# Altium PCB PCB_Sensors.PcbDoc
Units mm, origin at the board's own origin, x right, y up, seen from the top; angles counter-clockwise.
Board outline 180 x 30 mm, 2 copper layers (Top Layer, Bottom Layer); 14 components, 9 nets, 43 pads, 65 vias.
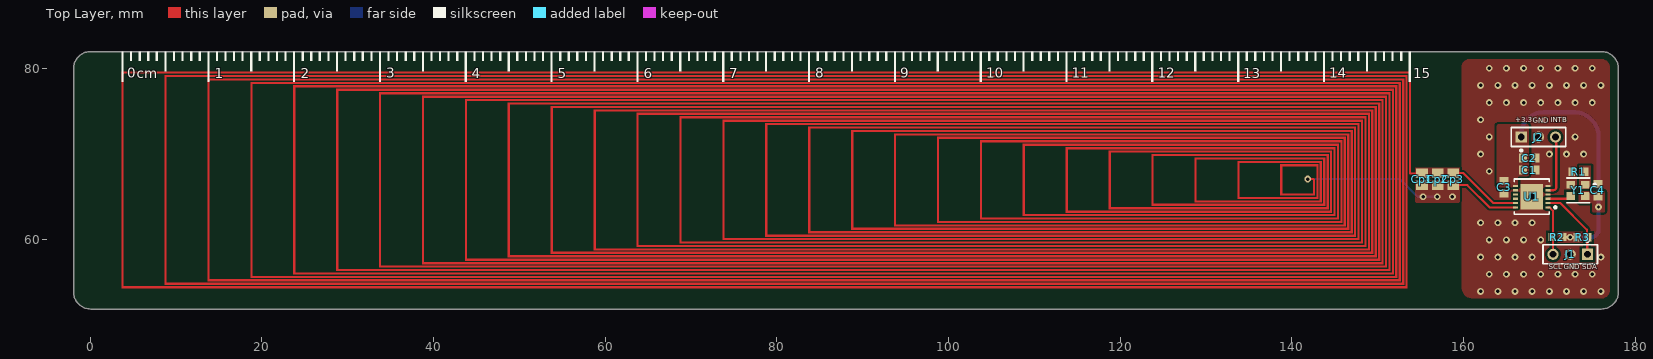
[diagram p0: Top Layer view]
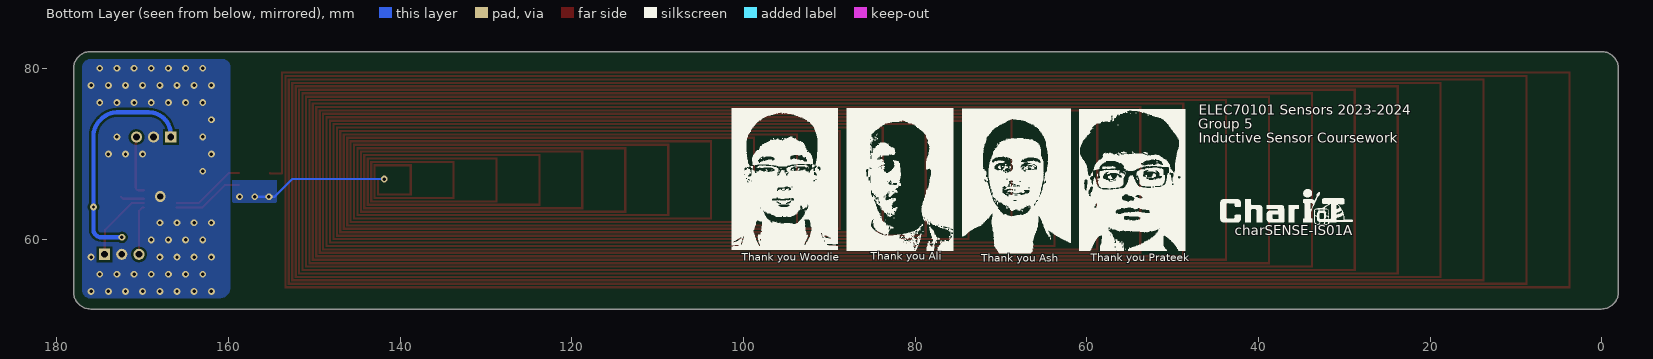
[diagram p1: Bottom Layer view, seen from below]
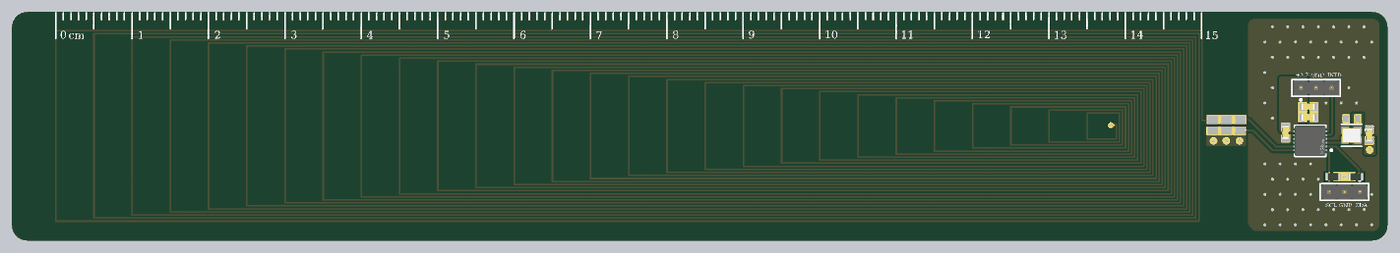
[diagram p2: 3D render of the assembled board from above, using the file's embedded part models]

## Layer stack, top to bottom
Top Solder: solder mask 0.0102, Solder Resist, Dk 3.5
Top Layer: signal copper 0.0356
Dielectric 1: dielectric 0.32, FR-4, Dk 4.8
Bottom Layer: signal copper 0.0356
Bottom Solder: solder mask 0.0102, Solder Resist, Dk 3.5

## Board outline
-1.946,53.943 -1.946,79.943 cw(c0.054,79.943) 0.054,81.943 176.054,81.943 cw(c176.054,79.943) 178.054,79.943 178.054,53.943 cw(c176.054,53.943) 176.054,51.943 0.054,51.943 cw(c0.054,53.943)

## Design rules (kind name [scope] priority, off if disabled: settings)
Clearance [All] p1: gap=0.254 ignorepadtopadclearanceinfootprint=FALSE except(0: Arc-Hole Track-Region Track-Hole SMDPad-Hole THPad-Hole Via-Region Via-Hole Fill-Hole Poly-Region Poly-Hole Region-Hole Text-Hole; 0.1: Track-Track)
DiffPairsRouting [All] p1: maxlimit=0.5 minlimit=0.254 mostfreqgap=0.4 toplayer_minwidth=0.254 toplayer_maxwidth=0.381 toplayer_prefwidth=0.254 bottomlayer_minwidth=0.254 bottomlayer_maxwidth=0.381 bottomlayer_prefwidth=0.254 maxuncoupledlength=12.7
PolygonConnect [All] p1: connectstyle=Direct reliefconductorwidth=0.254 reliefentries=4 polygonreliefangle="90 Angle" airgapwidth=0.254
RoutingVias [All] p1: holewidth=0.711 width=1.27 viastyle="Through Hole" minholewidth=0.711 minwidth=1.27 maxholewidth=0.711 maxwidth=1.27
SolderMaskExpansion [All] p1: expansion=0.102 istentingtop=FALSE
Width [All] p1: maxlimit=1 minlimit=0.1 preferedwidth=0.254 minimp=50.000000 maximp=50.000000 favimp=50.000000
29 further rules are at their usual default settings.

## Classes and differential pairs
differential pair IN1A: +IN1A_P -IN1A_N

## Components (designator, comment, footprint, x,y, rotation, side; value= is the part's Value field where it differs from the comment)
C1 "1u" CAPC1608X90X35ML10T15 167.665,68.121 r180 top
C2 "0.1u" CAPC1608X90X35ML10T15 167.665,69.518 r180 top
C3 "0.1u" CAPC1608X90X35ML10T15 164.719,66.116 r90 top
C4 "0.1u" CAPC1608X90X35ML10T15 175.666,65.786 r270 top
Cp1 "C0805C103K5RACTU" CAPC2013X88X50LL20T25 155.169,67.081 r90 top
Cp2 "C0805C103K5RACTU" CAPC2013X88X50LL20T25 156.997,67.081 r90 top
Cp3 "C0805C103K5RACTU" CAPC2013X88X50LL20T25 158.801,67.081 r90 top
J1 "M22-2010305" FP-M22-2010305-MFG 172.434,58.318 r180 top
J2 "M22-2010305" FP-M22-2010305-MFG 168.726,71.984 r0 top
R1 "0ohm" RESC1608X55X25ML10T15 173.406,67.92 r0 top
R2 "CRCW060310K0FKEA" RESC1609X50X30NL8T20 170.942,60.325 r0 top
R3 "CRCW060310K0FKEA" RESC1609X50X30NL8T20 173.888,60.3 r180 top
U1 "LDC1612DNTT" FP-DNT0012B-MFG 167.95,65.037 r180 top
Y1 "625L3C040M00000" FP-625-MFG 173.355,65.761 r180 top

## Footprints (in the part's own frame and the unit in brackets; to place one, negate y for a bottom-side part, rotate by r counter-clockwise, add the part's x,y. Pads: shape width x height; smd on the part's side, far side on the other; paste and mask are expansions set on the pad)
CAPC1608X90X35ML10T15 [mm] "Chip Capacitor, 2-Leads, Body 1.7x0.9mm, IPC Low Density"
  rect 0.95x1.05 smd: 1(-0.725,0) 2(0.725,0)
  body extent -0.85,-0.45 0.85,0.45, height 0.9
CAPC2013X88X50LL20T25 [mm] "Chip Capacitor, 2-Leads, Body 2.00x1.25mm, IPC High Density"
  rect 1.1x1.35 smd: 1(-0.7,0) 2(0.7,0)
  body extent -1.1,-0.72 1.1,0.72, height 0.88
FP-625-MFG [mm]
  rect 1x0.9 smd paste+0 mask+0: 1(-0.85,-0.65) 2(0.85,-0.65) 3(0.85,0.65) 4(-0.85,0.65)
  silkscreen extent -2.05,-1.45 1.33,1.45, body extent -1.45,-1.2 1.45,1.2, height 0.25
FP-DNT0012B-MFG [mm]
  rrect40% 0.6x0.25 smd paste+0 mask+0: 1(-1.9,1.25) 2(-1.9,0.75) 3(-1.9,0.25) 4(-1.9,-0.25) 5(-1.9,-0.75) 6(-1.9,-1.25) 7(1.9,-1.25) 8(1.9,-0.75) 9(1.9,-0.25) 10(1.9,0.25) 11(1.9,0.75) 12(1.9,1.25)
  rrect4% 2.6x3 smd paste-1000 mask+0: 13(0,0)
  silkscreen extent -2.88,-2.05 2.05,2.05, body extent -2.3,-2.15 2.3,2.15, height 0.25
FP-M22-2010305-MFG [mm]
  rect 1.3x1.3 hole 0.8 paste-1000 mask+0: 1(-2,0)
  round 1.3 hole 0.8 paste-1000 mask+0: 2(0,0) 3(2,0)
  silkscreen extent -3.17,-1.7 3.17,1.1, body extent -3.27,-1.2 3.27,1.2, height 0.25
RESC1608X55X25ML10T15 [mm] "Chip Resistor, 2-Leads, Body 1.60x0.80mm, IPC Low Density"
  rect 0.8x1 smd: 1(-0.75,0) 2(0.75,0)
  body extent -0.85,-0.45 0.85,0.45, height 0.55
RESC1609X50X30NL8T20 [mm] "Chip Resistor, 2-Leads, Body 1.65x0.95mm, IPC Medium Density"
  rect 0.8x0.95 smd: 1(-0.65,0) 2(0.65,0)
  body extent -0.82,-0.48 0.82,0.48, height 0.5

## Part data
C1 C2 C3 C4: library part CMP-2000-04945-1, "Chip Capacitor, 22 pF, +/- 5%, 50 V, -55 to 125 degC, 0603 (1608 Metric), RoHS, Tape and Reel", Capacitance=22pF, Case Size/Dimension=0603, Dielectric=C0G, Manufacturer=Murata, Package Description="2-Pin Surface Mount Device, Body 1.6 x 0.8 mm", Package Reference=603, Rated Voltage=50V, Tolerance (%)=±5%, Datasheet URL=https://datasheet.ciiva.com/11786/0900766b807a1cab-11786398.pdf, Datasheet Version=Jul-06, Manufacturer URL=http://www.murata.com/
Cp1 Cp2 Cp3: library part CMP-2007-00266-1, Manufacturer=Kemet, Part Number=C0805C103K5RACTU
J1 J2: library part CMP-15831-000100-1, "CONN HEADER VERT 3POS 2MM", Case/Package=SIL, Color=Black, Contact Resistance=20mR, Current Rating=1A, Flammability Rating="UL94 V-0", Insulation Resistance=10GR, Max Operating Temperature=105°C, Min Operating Temperature=-55°C, Package Quantity=1000, Voltage Rating=650V, Voltage Rating (AC)=250V, Connector Type="Male Pin", Contact Finish - Mating=GOLD, Contact Material=Bronze, Contact Mating Length=0.138inch, Contact Plating=Gold, Contact Shape=Square, Contact Type="Male Pin", Depth=2mm, Fastening Type=Pull, Housing Color=Black, Housing Material=Nylon, Insulation Color=Black, Insulation Material=Nylon, Lead Pitch=2mm, Length=6mm, Mated Stacking Heights=8.6mm, Max Current Rating=1A, Mount="Through Hole", Number of Contacts=3, Number of Positions=3, Number of Rows=1, Orientation=Straight, Packaging=Bulk, Pitch=2mm, Radiation Hardening=No, Reach SVHC Compliant=Yes, RoHS Compliant=Yes, Series=M22, Termination=Solder, Working Voltage=250V
R1: library part CMP-2100-03667-1, "Chip Resistor, 0 Ohm, +/- 5%, 0.1 W, -55 to 155 degC, 0603 (1608 Metric), RoHS, Tape and Reel", Case Code (Imperial)=0603, Case Code (Metric)=1608, Manufacturer=Yageo, Max Operating Temperature=155degC, Min Operating Temperature=-55degC, Package Description="2-Pin Surface Mount Device, Body 1.6 x 0.8 mm", Package Quantity=5000, Power Rating=100mW, Resistance=0mOhm, Temperature Coefficient=200ppm/degreesC, Tolerance=5%, Voltage Rating=50V, Case/Package=0603, Composition=ThickFilm, Contact Plating=Tin, Datasheet URL=http://www.yageo.com/NewPortal/yageodocoutput?fileName=/pdf/R-Chip/PYu-RC_Group_51_RoHS_L_5.pdf, Datasheet Version="Rev. 5, 10/2016", Depth=0.8mm, Height=0.45mm, Lead Free=LeadFree, Length=1.6mm, Manufacturer URL=http://www.yageo.com/, Military Standard=Not, Number of Pins=2, Package Reference=0603, Packaging=TapeandReel, Radiation Hardening=No, REACH SVHC=NoSVHC, RoHSCompliant=true, Termination=SMD/SMT, Voltage Rating (DC)=50V, Width=0.8mm
R2 R3: library part CMP-1666-00005-4, "Chip Resistor, 10 KOhm, +/- 1%, 100 mW, -55 to 155 degC, 0603 (1608 Metric), RoHS, Tape and Reel", Manufacturer="Vishay Semiconductor", Max Operating Temperature="155 degC", Min Operating Temperature="-55 degC", Package Quantity=5000, Voltage Rating="75 V", ComponentLink1Description="Manufacturer URL", ComponentLink1URL=http://www.vishay.com/, ComponentLink2Description=Datasheet, ComponentLink2URL=https://datasheet.ciiva.com/11809/0900766b80d98afc-11809037.pdf, DatasheetVersion=06/2012, Height="0.45 mm", Length="1.55 mm", Mounting Technology="Surface Mount", PackageDescription="2-Pin Surface Mount Device, Body 1.575 x 0.85 mm", PackageReference=0603, Packaging="Tape and Reel", REACH SVHC=Unknown, RoHSCompliant=true
U1: library part CMP-04859-000002-1, "IC IND TO DGTL 28BIT 1K 12WSON", Max Operating Temperature=125°C, Min Operating Temperature=-40°C, Contact Plating=Tin, Interface=I2C, Lead Free="Lead Free", Mount="Surface Mount", Number of Inputs=2, Number of Pins=12, Packaging="Cut Tape", REACH SVHC="No SVHC", Resolution=28b, RoHS Compliant=Yes, Sampling Rate=1000S/s, Supply Type=Single
Y1: library part CMP-06858-000003-1, "XTAL OSC XO 40.0000MHZ CMOS SMD", Case/Package=CSMD, Frequency=40MHz, Frequency Stability=50ppm, Load Capacitance=15pF, Max Operating Temperature=70°C, Max Supply Current=15mA, Max Supply Voltage=3.63V, Min Operating Temperature=-10°C, Min Supply Voltage=2.97V, Operating Supply Voltage=3.3V, Package Quantity=3000, Contact Plating=Gold, Depth=2mm, Height=0.039inch, Length=2.5mm, Mount="Surface Mount", Packaging="Tape and Reel", Radiation Hardening=No, Termination=SMD/SMT, Width=0.079inch

## Via types
v1: diameter 0.8, hole 0.4, Top Layer to Bottom Layer, tented both sides, 58 vias
v2: diameter 0.8, hole 0.4, Top Layer to Bottom Layer, 6 vias
v3: diameter 1.27, hole 0.711, Top Layer to Bottom Layer, 1 vias

## Nets (pads, with @x,y where several pads share a name; then routed paths per layer and width w, separated by ;. In a path a pad name is that pad's centre, name@x,y a point inside that pad or via, vN(x,y) a via of type N, cw(c..) or ccw(c..) an arc to the next point about the centre after c; other vN are vias at no path point)
+3.3: C1.2 C2.2 C3.2 C4.2 J2.1 R2.2 R3.2 U1.7 Y1.4 | length 27
  Bottom Layer w0.5: J2.1@166.732,72.06 166.732,72.31 cw(c169.272,72.31) 167.476,74.106 167.48,74.11 cw(c169.276,72.314) 169.276,74.854 172.989,74.854 cw(c172.989,72.314) 174.785,74.11 174.987,73.907 cw(c173.191,72.111) 175.731,72.111 v2(175.731,63.827) 175.731,61.203 cw(c174.828,61.203) 174.828,60.3 v2(172.415,60.3)
GND: C1.1 C2.1 C3.1 C4.1 J1.2 J2.2 R1.1 U1.4 U1.6 U1.8 U1.13 Y1.2
  other v1: 162,54 164,54 166,54 168,54 170,54 172,54 174,54 176,54 163,56 165,56 167,56 169,56 171,56 173,56 175,56 162,58 164,58 166,58 168,58 176,58 163,60 165,60 167,60 169,60 162,62 164,62 166,62 168,62 163,68 162,70 170,70 172,70 174,70 163,72 173,72 162,74 163,76 165,76 167,76 169,76 171,76 173,76 175,76 162,78 164,78 166,78 168,78 170,78 172,78 174,78 176,78 163,80 165,80 167,80 169,80 171,80 173,80 175,80
  other v3: 167.95,65.037
IN1A_N: Cp1.1 Cp2.1 Cp3.1 U1.12 | length 24.3
  Top Layer w0.254: Cp3.1 160.43,66.381 163.024,63.787 U1.12
  Bottom Layer w0.254: 141.859,67.081 152.578,67.081 154.635,65.024 v2(156.947,65.024)
  other v2: 155.296,65.024 158.699,65.024
IN1A_P: Cp1.2 Cp2.2 Cp3.2 U1.11 | length 10.2
  Top Layer w0.254: 153.773,67.716 155.169,67.716 Cp1.2 ; Cp3.2 159.955,67.781 163.449,64.287 U1.11
INTB: J2.3 U1.5 | length 7.3
  Top Layer w0.254: U1.5 170.461,65.787 ccw(c170.461,66.142) 170.815,66.142 J2.3@170.815,72.263
NetR1_2: R1.2 Y1.1
NetU1_3: U1.3 Y1.3 | length 2.8
  Top Layer w0.254: U1.3 172.283,64.787 Y1.3@172.53,65.034
SCL: J1.3 R2.1 U1.1 | length 5.9
  Top Layer w0.254: U1.1 170.021,63.787 170.415,63.393 170.415,60.503 J1.3@170.415,58.268
SDA: J1.1 R3.1 U1.2 | length 8.7
  Top Layer w0.254: U1.2 171.272,64.287 174.371,61.189 174.371,60.34 R3.1@174.411,60.3 ; J1.1@174.415,58.268 R3.1@174.415,60.3
pads on no net: U1.9 U1.10
copper on no net: | length 0.7
  Top Layer w0.254: v2@141.864,67.087 142.573,67.087
  other v2: 141.859,67.081

## Polygon pours and split planes (outlines as drawn)
+3.3 on Top Layer "NONET_L-01_P-001" (solid, pour order 10): 170.967,59.671 173.888,59.671 173.888,60.929 170.967,60.929
+3.3 on Top Layer "NONET_L-01_P-001" (solid, pour order 14): 163.881,73.279 cw(c164.059,73.279) 164.059,73.457 167.462,73.457 cw(c167.462,73.304) 167.615,73.304 167.615,67.626 cw(c167.411,67.626) 167.411,67.423 166.534,67.423 ccw(c166.534,67.234) 166.345,67.234 166.345,66.187 cw(c166.3,66.187) 166.3,66.142 164.272,66.142 cw(c164.272,66.534) 163.881,66.534
GND on Top Layer "NONET_L-01_P-001" (solid, remove dead copper, pour order 21): 159.817,54.407 159.817,80.213 cw(c160.655,80.213) 160.655,81.051 176.073,81.051 cw(c176.073,80.112) 177.013,80.112 177.013,54.127 cw(c176.073,54.127) 176.073,53.188 161.036,53.188 cw(c161.036,54.407)
NetR1_2 on Top Layer "NONET_L-01_P-001" (solid, pour order 13): 173.482,65.811 173.482,68.631 174.854,68.631 174.854,65.811
+3.3 on Top Layer "NONET_L-01_P-001" (solid, pour order 12): 173.426,64.47 ccw(c173.609,64.47) 173.609,64.287 174.803,64.287 cw(c174.803,64.084) 175.006,64.084 175.006,63.373 ccw(c175.184,63.373) 175.184,63.195 176.322,63.195 ccw(c176.322,63.348) 176.474,63.348 176.474,65.481 ccw(c176.271,65.481) 176.271,65.684 173.629,65.684 ccw(c173.629,65.481) 173.426,65.481
IN1A_N on Top Layer "NONET_L-01_P-001" (solid, pour order 20): 154.361,64.536 ccw(c154.559,64.536) 154.559,64.338 158.242,64.338 159.385,64.338 ccw(c159.385,64.521) 159.568,64.521 159.568,66.925 154.361,66.925
IN1A_P on Top Layer "NONET_L-01_P-001" (solid, pour order 19): 154.381,68.428 154.381,67.234 159.588,67.234 159.588,68.428
+3.3 on Top Solder "NONET_L-01_P-001" (solid, pour order 9): 170.967,59.671 173.888,59.671 173.888,60.929 170.967,60.929
IN1A_P on Top Solder "NONET_L-01_P-001" (solid, pour order 17): 154.381,68.428 154.381,67.234 159.588,67.234 159.588,68.428
IN1A_N on Top Solder "NONET_L-01_P-001" (solid, pour order 4): 154.356,66.929 154.356,65.735 159.563,65.735 159.563,66.929
IN1A_N on Bottom Layer "NONET_L-01_P-001" (solid, pour order 18): 154.361,64.536 ccw(c154.559,64.536) 154.559,64.338 158.242,64.338 159.385,64.338 ccw(c159.385,64.521) 159.568,64.521 159.568,66.925 154.361,66.925
GND on Bottom Layer "NONET_L-01_P-001" (solid, remove dead copper, pour order 15): 159.817,54.407 159.817,80.213 cw(c160.655,80.213) 160.655,81.051 176.073,81.051 cw(c176.073,80.112) 177.013,80.112 177.013,54.127 cw(c176.073,54.127) 176.073,53.188 161.036,53.188 cw(c161.036,54.432) 159.791,54.432

## Other copper
Top Layer:
  region: 229 vertices and 0 holes, not listed, extent 3.673,54.387 153.873,79.587

## Silkscreen, mask and mechanical layers (free items; w line width, h text height)
Top Overlay:
  drawing of 151 lines, arcs and shapes, not listed
  text "9" at 94.388,78.481 h2
  text "10" at 104.369,78.481 h2
  text "12" at 124.358,78.486 h2
  text "0" at 4.32,78.455 h2
  text "3" at 34.49,78.453 h2
  text "8" at 84.457,78.455 h2
  text "11" at 114.346,78.459 h2
  text "14" at 144.357,78.452 h2
  text "cm" at 5.436,78.43 h2
  text "1" at 14.529,78.435 h2
  text "2" at 24.513,78.435 h2
  text "4" at 44.471,78.433 h2
  text "5" at 54.485,78.43 h2
  text "6" at 64.467,78.43 h2
  text "13" at 134.366,78.43 h2
  text "7" at 74.444,78.408 h2
  text "15" at 154.161,78.396 h2
  text "+3.3" at 166.041,73.464 h1
  text "INTB" at 170.18,73.459 h1
  text "GND" at 168.046,73.439 h1
  text "SCL" at 169.926,56.345 h1
  text "GND" at 171.704,56.345 h1
  text "SDA" at 173.863,56.345 h1
Bottom Overlay:
  drawing of 310 lines, arcs and shapes, not listed
  text "ELEC70101 Sensors 2023-2024" at 46.965,74.158 h2
  text "Group 5" at 47.015,72.529 h2
  text "Inductive Sensor Coursework" at 46.939,70.932 h2
  text "charSENSE-IS01A" at 42.774,60.137 h2
  text "Thank you Ali" at 85.192,57.398 h1.52
  text "Thank you Woodie" at 100.178,57.296 h1.52
  text "Thank you Prateek" at 59.538,57.194 h1.52
  text "Thank you Ash" at 72.314,57.169 h1.52
Top Solder:
  region: 167.869,70.157 167.869,67.488 169.012,67.488 169.012,70.157
  region: 166.345,70.155 166.345,67.513 167.538,67.513 167.538,70.155
Mechanical 1:
  the board outline again, w0.254